# Altium PCB DBMPCB.PcbDoc
Units mm, origin at the board's own origin, x right, y up, seen from the top; angles counter-clockwise.
Board outline 82.68 x 108 mm, 2 copper layers (Top Layer, Bottom Layer); 19 components, 22 nets, 104 pads, 77 vias.
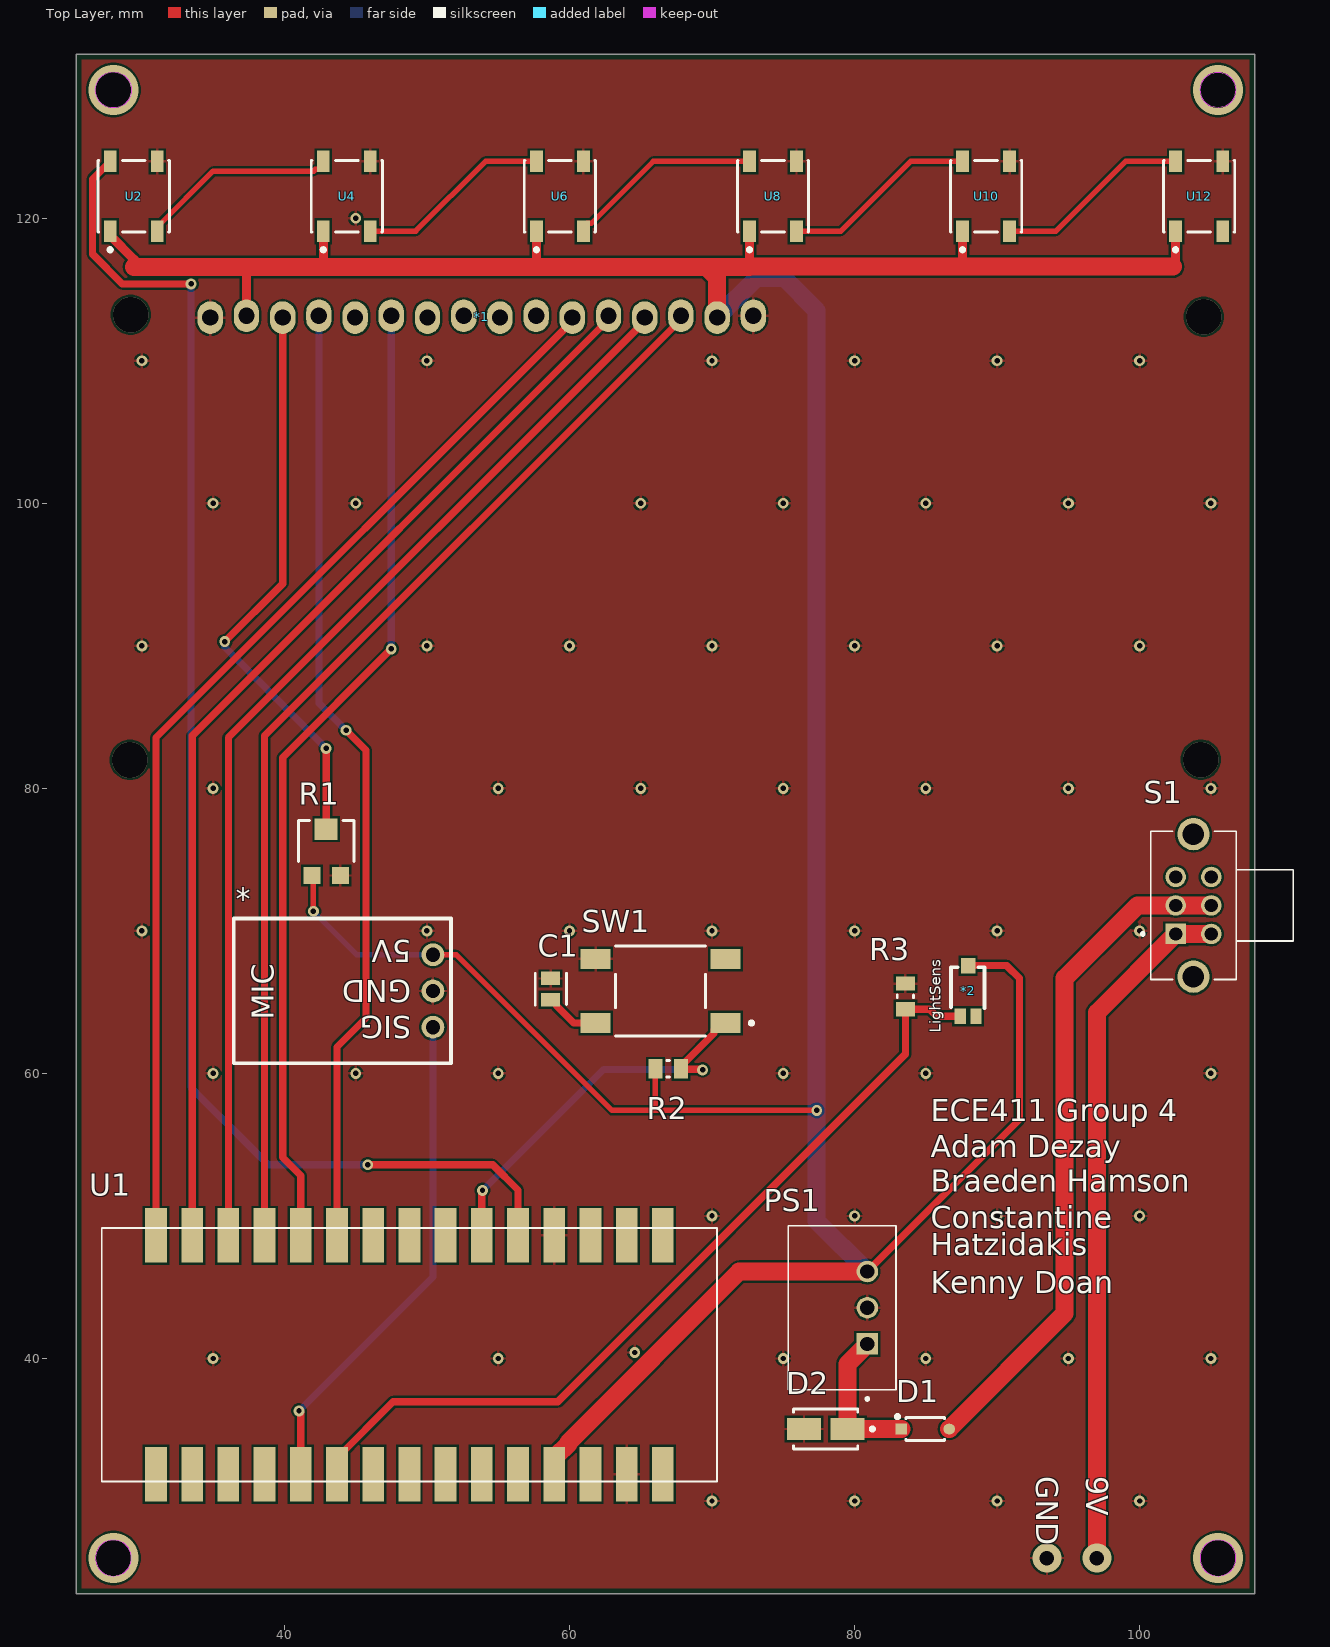
[diagram p0: Top Layer view]
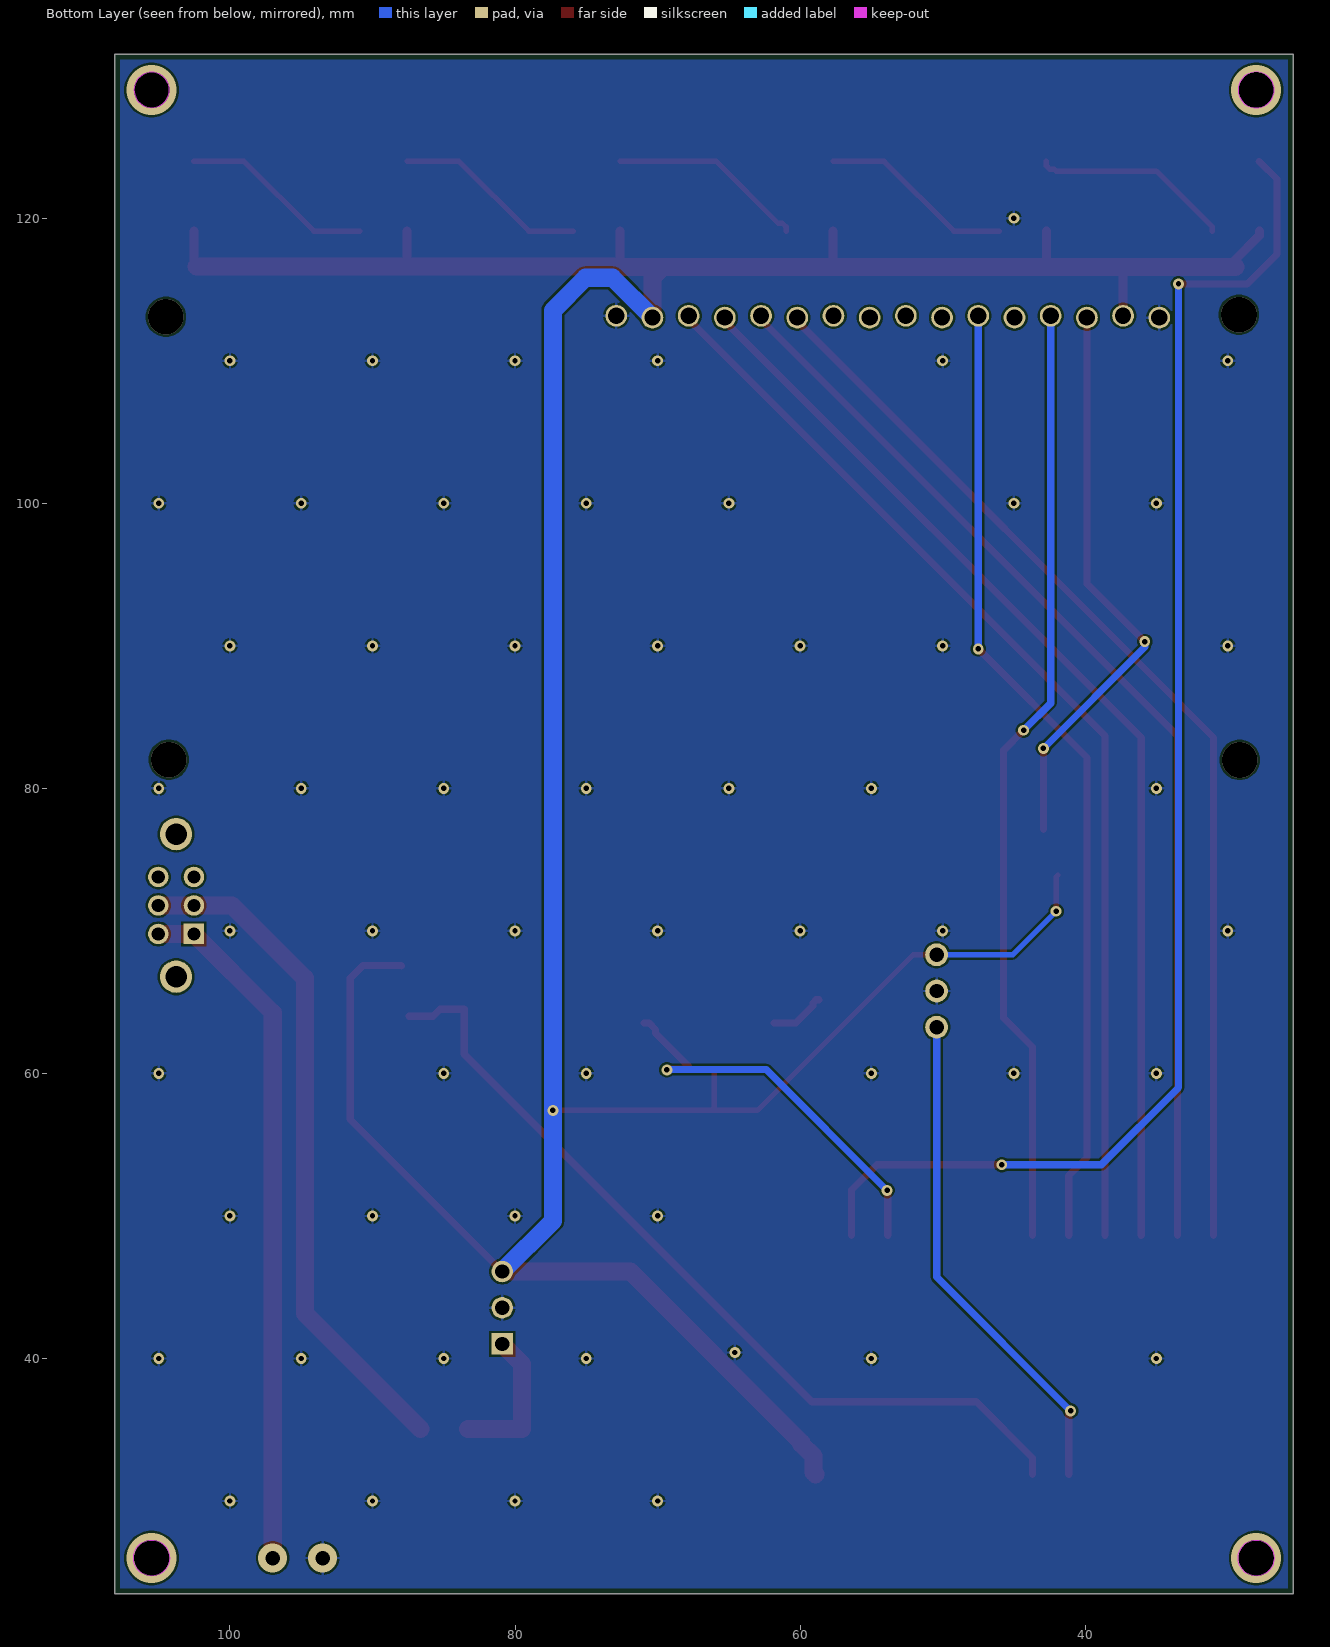
[diagram p1: Bottom Layer view, seen from below]
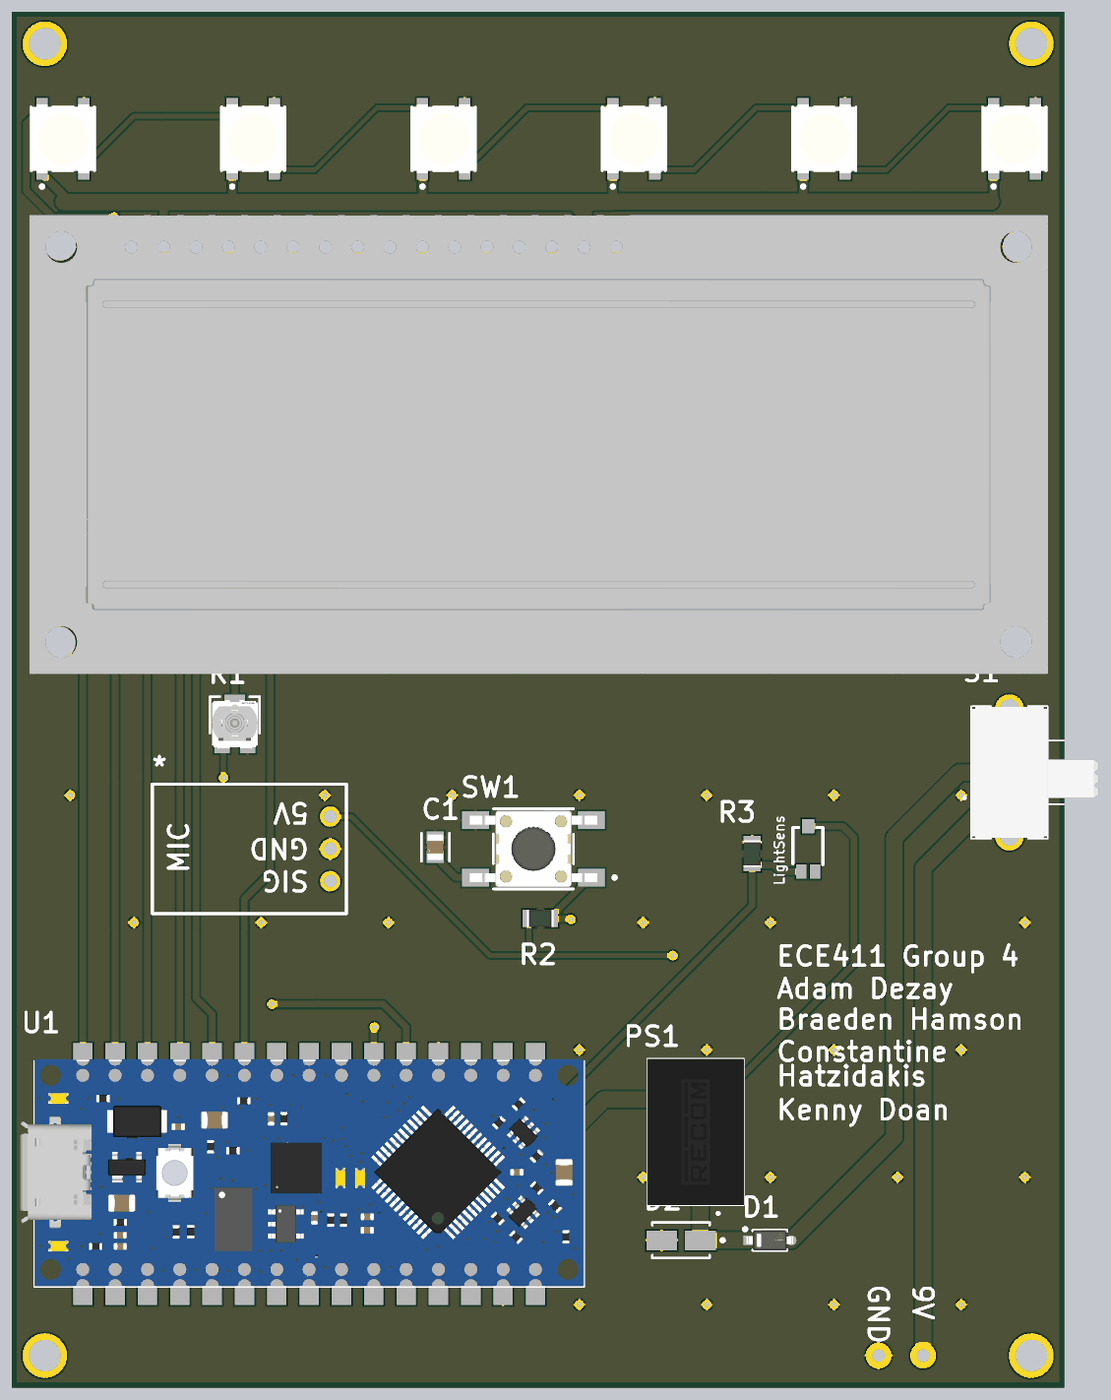
[diagram p2: 3D render of the assembled board from above, using the file's embedded part models]

## Layer stack, top to bottom
Top Solder: solder mask 0.0102, Solder Resist, Dk 3.5
Top Layer: signal copper 0.0356
Dielectric 1: dielectric 0.32, FR-4, Dk 4.8
Bottom Layer: signal copper 0.0356
Bottom Solder: solder mask 0.0102, Solder Resist, Dk 3.5

## Board outline
25.4,23.5 108.077,23.5 108.077,131.5 25.4,131.5
cut-out: 105.5,127.762 cw(c105.5,129) 104.262,129 cw(c105.5,129) 105.5,130.238 cw(c105.5,129) 106.738,129 cw(c105.5,129)
cut-out: 104.239,26 ccw(c105.5,26) 105.5,24.739 ccw(c105.5,26) 106.761,26 ccw(c105.5,26) 105.5,27.261 ccw(c105.5,26)
cut-out: 26.739,26 ccw(c28,26) 28,24.739 ccw(c28,26) 29.261,26 ccw(c28,26) 28,27.261 ccw(c28,26)
cut-out: 28,127.736 cw(c28,129) 26.736,129 cw(c28,129) 28,130.264 cw(c28,129) 29.264,129 cw(c28,129)

## Design rules (kind name [scope] priority, off if disabled: settings)
BoardOutlineClearance [All] p1: gap=0.381 ignorepadtopadclearanceinfootprint=FALSE
Clearance [All] p1: gap=0.152 ignorepadtopadclearanceinfootprint=FALSE except(0: Arc-Hole Track-Hole SMDPad-Hole THPad-Hole Via-Hole Fill-Hole Poly-Hole Region-Hole Text-Hole)
ComponentClearance [All] p1: gap=0.025 collisioncheckmode=3 verticalgap=0.025 showdistances=FALSE
DiffPairsRouting [All] p1: maxlimit=10 minlimit=0.152 mostfreqgap=0.203 toplayer_minwidth=0.152 toplayer_maxwidth=0.381 toplayer_prefwidth=0.203 bottomlayer_minwidth=0.152 bottomlayer_maxwidth=0.381 bottomlayer_prefwidth=0.203 maxuncoupledlength=12.7
HoleSize [All] p1: absolutevalues=TRUE maxlimit=6.731 minlimit=0.33 maxpercent=80.000 minpercent=20.000
HoleToHoleClearance [All] p1: gap=0.254 allowstackedmicrovias=FALSE
MinimumAnnularRing [All] p1: minimumring=0.178
MinimumSolderMaskSliver [All] p1: minsoldermaskwidth=0
PlaneClearance [All] p1: clearance=0.254
PlaneConnect [All] p1: planeconnectstyle=Direct reliefexpansion=0.406 reliefentries=4 reliefconductorwidth=0.152 reliefairgap=0.152
PolygonConnect [All] p1: connectstyle=Relief reliefconductorwidth=0.203 reliefentries=4 polygonreliefangle="90 Angle" airgapwidth=0.152
RoomDefinition DBMSch [InComponentClass('DBMSch')] p1: confinementstyle=ConfineIn formatcopy=TRUE lockcomponents=FALSE outline 0,0 50.8,0 50.8,25.4 0,25.4
RoutingCorners [All] p1: cornerstyle=45-Degree minsetback=1.25 maxsetback=1.25
RoutingVias [All] p1: holewidth=0.381 width=0.762 viastyle="Through Hole" minholewidth=0.33 minwidth=0.686 maxholewidth=2.54 maxwidth=2.896
SilkToSilkClearance [All] p1: silktosilkclearance=0
SilkToSolderMaskClearance [IsPad] p1: minsilkscreentomaskgap=0.152 clearancetoexposedcopper=TRUE
SolderMaskExpansion [All] p1: expansion=0.075 istentingtop=FALSE
Width [All] p1: maxlimit=10.16 minlimit=0.152 preferedwidth=0.508 minimp=50.000000 maximp=50.000000 favimp=50.000000
20 further rules are at their usual default settings.

## Components (designator, comment, footprint, x,y, rotation, side; value= is the part's Value field where it differs from the comment)
* "Sparkfun MEMs Mic" "MEMs Mic Board" 50.419,68.326 r180 top
*1 "Display" Screen 34.798,113.03 r0 top
*2 "TEMT6000 Light Sensor" "Light Sensor" 87.969,67.561 r90 top
C1 "C0805C105Z4VACTU" FP-C0805C105Z4VACTU-MFG 58.674,65.913 r90 top
D1 "MBR0520LT1G" FP-425-04-IPC_C 84.963,35.052 r0 top
D2 "SMAJ12A-E3/61" VISH-DO-214AC-2_N 77.978,35.052 r180 top
PS1 "R-785.0-1.0" CONV_R-785.0-1.0 79.124,43.561 r90 top
R1 "TC33X-2-104E" FP-TC33X-2-MFG 42.926,75.565 r0 top
R2 "RC0805FR-0710KL" RESC2013X60X35NL10T20 66.929,60.325 r180 top
R3 "RC0805FR-0710KL" RESC2013X60X35NL10T20 83.566,65.405 r270 top
S1 "EG2208" SW_EG2208 103.779,71.787 r90 top
SW1 "1571563-9" FP-1571563-9-MFG 66.389,65.786 r180 top
U1 "Arduino Nano Every" MODULE_ABX00028 48.768,40.259 r0 top
U2 "1655" ADA-RGB-1655_V 29.427,121.539 r90 top
U4 "1655" ADA-RGB-1655_V 44.377,121.539 r90 top
U6 "1655" ADA-RGB-1655_V 59.327,121.539 r90 top
U8 "1655" ADA-RGB-1655_V 74.277,121.539 r90 top
U10 "1655" ADA-RGB-1655_V 89.227,121.539 r90 top
U12 "1655" ADA-RGB-1655_V 104.177,121.539 r90 top

## Footprints (in the part's own frame and the unit in brackets; to place one, negate y for a bottom-side part, rotate by r counter-clockwise, add the part's x,y. Pads: shape width x height; smd on the part's side, far side on the other; paste and mask are expansions set on the pad)
ADA-RGB-1655_V [mm] "SMD, 4-Leads, Body 5x5mm"
  rect 1.5x0.9 smd: 1(-2.45,1.65) 2(-2.45,-1.65) 3(2.45,-1.65) 4(2.45,1.65)
  silkscreen extent -3.87,-2.5 2.5,2.5, body extent -2.7,-2.5 2.7,2.5, height 1.68
CONV_R-785.0-1.0 [mm]
  rect 1.508x1.508 hole 1: 1(-2.54,-1.775)
  round 1.508 hole 1: 2(0,-1.775) 3(2.54,-1.775)
  silkscreen extent -6.5,-3.77 5.75,3.77, body extent -5.75,-3.8 5.75,3.8, height 10.31
FP-425-04-IPC_C [mm]
  rect 0.808x0.742 smd paste+0 mask+0: 1(-1.68,0)
  rrect100% 0.808x0.742 smd paste+0 mask+0: 2(1.68,0)
  silkscreen extent -2.07,-0.8 1.35,1, body extent -2.18,-0.9 2.18,0.9, height 0.25
FP-1571563-9-MFG [mm]
  rect 2.1x1.4 smd paste+0 mask+0: 1(-4.55,2.25) 2(4.55,2.25) 3(-4.55,-2.25) 4(4.55,-2.25)
  silkscreen extent -6.5,-3.15 3.15,3.15, body extent -5.7,-3.25 5.7,3.25, height 0.25
FP-C0805C105Z4VACTU-MFG [mm]
  rect 0.95x1.35 smd paste+0 mask+0: 1(-0.75,0) 2(0.75,0)
  silkscreen extent -1.1,-1.11 1.11,1.07, body extent -1.4,-0.85 1.4,0.85, height 0.25
FP-TC33X-2-MFG [mm]
  rect 1.2x1.2 smd paste+0 mask+0: 1(-1,-1.675) 3(1,-1.675)
  rect 1.6x1.5 smd paste+0 mask+0: 2(0,1.575)
  silkscreen extent -1.95,-0.7 1.95,2.17, body extent -2.05,-2.37 2.05,2.42, height 0.25
"Light Sensor" [mm]
  rect 1.1x0.8 smd: 0(-3.55,0.55) ""(-3.55,-0.55)
  rect 1.1x1 smd: 1(0,0)
  silkscreen extent -3,-1.15 -0.1,1.2
"MEMs Mic Board" [mm]
  round 1.6 hole 1: 1(0,0) 2(0,2.54) 3(0,5.08)
  silkscreen extent -1.27,-2.54 13.97,7.62
MODULE_ABX00028 [mil]
  rect 60x150 smd: 1(-700,-330) 2(-600,-330) 3(-500,-330) 4(-400,-330) 5(-300,-330) 6(-200,-330) 7(-100,-330) 8(0,-330) 9(100,-330) 10(200,-330) 11(300,-330) 12(400,-330) 13(500,-330) 14(600,-330) 15(700,-330) 16(700,330) 17(600,330) 18(500,330) 19(400,330) 20(300,330) 21(200,330) 22(100,330) 23(0,330) 24(-100,330) 25(-200,330) 26(-300,330) 27(-400,330) 28(-500,330) 29(-600,330) 30(-700,330)
  silkscreen extent -850,-350 850,350, body extent -894,-345 850,355, height 142
RESC2013X60X35NL10T20 [mm] "Chip Resistor, 2-Leads, Body 2.1x1.35mm, IPC Medium Density"
  rect 1x1.35 smd: 1(-0.9,0) 2(0.9,0)
  silkscreen extent -0.1,-0.58 0.1,0.58, body extent -1.05,-0.68 1.05,0.67, height 0.6
Screen [mil]
  oval 70x90 / inner round 60 / far side round 60 hole 45: 1(0,0) 2(100,5) 3(200,0) 4(300,5) 5(400,0) 6(500,5) 7(600,0) 8(700,5) 9(800,0) 10(900,5) 11(1000,0) 12(1100,5) 13(1200,0) 14(1300,5) 15(1400,0) 16(1500,5)
  body extent -315,-1319 2835,99, height 348
SW_EG2208 [mm]
  rect 1.438x1.438 hole 0.93: 1(-2,1.25)
  round 1.438 hole 0.93: 2(0,1.25) 3(2,1.25) 4(-2,-1.25) 5(0,-1.25) 6(2,-1.25)
  round 2.265 hole 1.51: S1(-5,0) S2(5,0)
  silkscreen extent -5.2,-7 5.2,3.65, body extent -5.15,-7 5.15,3, height 5
VISH-DO-214AC-2_N [mm] "DO-214AC, 2-Leads, Body 4.5x2.79mm, IPC Medium Density"
  rect 2.4x1.55 smd: 1(-1.525,0) 2(1.525,0)
  silkscreen extent -3.4,-1.4 2.25,1.4, body extent -2.25,-1.4 2.25,1.39, height 2.29

## Part data
*2: library part "Light Sensor"
C1: library part CMP-2007-03241-2, "CAP CER 1UF 16V Y5V 0805", Capacitance=1uF, Case Code (Imperial)=0805, Case Code (Metric)=2012, Dielectric=Y5V, Dielectric Material=Ceramic, Max Operating Temperature=85°C, Min Operating Temperature=-30°C, Package Quantity=1, Tolerance=80%, Voltage=16V, Case/Package=0805, Construction=Flat, Contact Material=Tin, Depth=1.25mm, Dissipation Factor=7%, Height=1.25mm, Lead Free="Lead Free", Lead Pitch=0.75mm, Length=2mm, Mount="Surface Mount", Number of Pins=2, Packaging="Tape and Reel", Radiation Hardening=No, REACH SVHC="No SVHC", RoHS Compliant=Yes, Series=C, Termination=SMD/SMT, Thickness=0.055inch, Voltage Rating=16V, Voltage Rating (DC)=16V, Width=0.049inch
D1: library part CMP-1055-00425-2, "DIODE SCHOTTKY 20V 500MA SOD123", Average Rectified Current=500mA, Case/Package=SOD-123-2, Forward Voltage=385mV, Max Forward Surge Current (Ifsm)=5.5A, Max Operating Temperature=125°C, Max Repetitive Reverse Voltage (Vrrm)=20V, Max Reverse Leakage Current=250uA, Min Operating Temperature=-65°C, Package Quantity=3000, Contact Plating=Tin, Current Rating=500mA, Element Configuration=Single, Forward Current=500mA, Height=1.12mm, Lead Free="Lead Free", Length=2.69mm, Max Reverse Voltage (DC)=20V, Max Surge Current=5.5A, Number of Pins=2, Output Current=500mA, Packaging="Tape and Reel", Peak Non-Repetitive Surge Current=5.5A, Peak Reverse Current=250uA, Polarity=Standard, Radiation Hardening=No, REACH SVHC="No SVHC", Termination=SMD/SMT, Voltage Rating (DC)=20V, Width=1.6mm
D2: library part CMP-0544-00020-2, "Transient Voltage Suppressor, 6.40 to 231 V, 12 V Stand-off Voltage, Uni-Directional, -55 to 155 degC, 2-pin DO-214AC, Pb-Free, Tape and Reel", Manufacturer="Vishay Semiconductor", Operating Junction and Storage Temperature Range="-55 to 150 degC", ComponentLink1Description="Manufacturer URL", ComponentLink1URL=http://www.vishay.com/, ComponentLink2Description=Datasheet, ComponentLink2URL=http://www.vishay.com/docs/88390/smaj50a.pdf, ComponentLink3Description="Package Specification", ComponentLink3URL=http://www.vishay.com/docs/88390/smaj50a.pdf, DatasheetVersion=12/8/2013, ID (uA)=1, IFSM="40 A", Mounting Technology="Surface Mount", PackageDescription="2-Pin DO-214AC (SMA), Body 4.245 x 2.665 mm", PackageReference=DO-214AC-2, Packing="Tape and Reel", PartNumber=SMAJ12A-E3/61, PPPM (W)="400, 300", RoHS=TRUE, VBR Uni-Directional (V)="6.4 to 231", VWM (V)=12
PS1: "1.0 Amp SIP3 Single Output", Package=None, Availability=Unavailable, MF="{'manufacturer': u'Recom Power'}", MP=R-785.0-1.0, Price=None
R1: library part CMP-07234-000040-1, "TRIMMER 100K OHM 0.1W J LEAD TOP", Color=Silver, Max Operating Temperature=100°C, Max Power Dissipation=100mW, Min Operating Temperature=-40°C, Package Quantity=2500, Resistance=100kR, Resistance Tolerance=25%, Resistor Type=Carbon, Temperature Coefficient=250ppm/°C, Voltage Rating (DC)=50V, Depth=3.8mm, Height=0.047inch, Length=3mm, Military Standard=Not, Mount="Surface Mount", Number of Turns=1, Packaging="Tape and Reel", Power Rating=100mW, Radiation Hardening=No, REACH SVHC="No SVHC", RoHS Compliant=Yes, Series=TC33, Termination="Foot Print", Tolerance=25%, Weight=29.4mg, Width=0.118inch
R2 R3: library part CMP-1659-00013-4, "Chip Resistor, 10 KOhm, +/- 1%, 0.125 W, -55 to 155 degC, 0805 (2012 Metric), RoHS, Tape and Reel", Manufacturer=Yageo, Max Operating Temperature="155 degC", Min Operating Temperature="-55 degC", Package Quantity=5000, Voltage Rating="150 V", ComponentLink1Description="Manufacturer URL", ComponentLink1URL=http://www.yageo.com/, ComponentLink2Description=Datasheet, ComponentLink2URL=http://www.yageo.com/documents/recent/PYu-RC_Group_51_RoHS_L_04.pdf, DatasheetVersion="Rev. 4, 02/2016", Height="0.5 mm", Length="2 mm", Mount="Surface Mount", Mounting Technology="Surface Mount", PackageDescription="2-Pin Surface Mounted Device, Body 2 x 1.25 mm", PackageReference=0805, Packaging="Tape and Reel", Pins=2, REACH SVHC="No SVHC", RoHSCompliant=true
S1: Package=None, Availability=Unavailable, MF="{'manufacturer': u'E-Switch'}", MP=EG2208, Price=None
SW1: library part CMP-03402-000005-1, "SWITCH TACTILE SPST-NO 0.05A 24V", Contact Current Rating=50mA, Contact Resistance=100mΩ, Manufacturer="TE Connectivity", Operating Force=160gf, Package=SMT_SW_6MM0_6MM0, Temperature="-35°C to +85°C", Temperature Range High=+85°C, Temperature Range Low=-35°C, Voltage Rating Dc=24V, Automotive=No, Category=Switch, ComponentLink2Description=Datasheet, ComponentLink2URL=https://www.te.com/commerce/DocumentDelivery/DDEController?Action=showdoc&DocId=Customer+Drawing%7F2-1437565-7%7FV%7Fpdf%7FEnglish%7FENG_CD_2-1437565-7_V.pdf%7F1571563-9, Device Class L1=Electromechanical, Device Class L2=Switches, Device Class L3="Pushbutton Switches", Digikey Description="SWITCH TACTILE SPST-NO 0.05A 24V", Electromechanical Life=100000Cycles, Height=9.75mm, Lead Free=Yes, Manufacturer Part Number=1571563-9, Mount="Surface Mount", Mouser Description="Tactile Switches SPST OFF(ON) RND SMT MINI PB TACT SWITCH", Octopart=https://octopart.com/1571563-9-te+connectivity-41253969, RoHS=TRUE, Standoff Height=0.05mm, Throw Configuration=SPST-NO
U1: library part ABX00028, "ATmega4809 Arduino Nano Every AVR AVR MCU 8-Bit Embedded Evaluation Board", Package=None, Availability=Unavailable, MF="{'manufacturer': u'Arduino'}", MP=ABX00028, Price=None
U2 U4 U6 U8 U10 U12: library part CMP-2000-05026-1, "Intelligent Control LED Integrated Light Source, 3.5 to 5.3 V, -25 to 80 degC, 4-Pin SMD, RoHS, Tape and Reel", Color=Red,Green,Blue(RGB), Manufacturer=Adafruit-Industries-LLC, Package Description="4-Pin Surface Mount Device, Body 5 x 5 mm", Category=Optoelectronics, Configuration=Discrete, Controller Type=-, Datasheet URL=http://datasheet.octopart.com/ADA1655-Adafruit-Industries-datasheet-32028139.pdf, Datasheet Version=May-13, Family=Addressable,Specialty, Interface=-, Manufacturer URL=https://www.adafruit.com/, Mounting Type=SurfaceMount, Number of LEDs=10, Package Reference=1655, Series=Neopixel, Size / Dimension=5.00mmLx5.00mmW, Utilized LED=WS2812(5050)

## Via types
v1: diameter 0.762, hole 0.381, Top Layer to Bottom Layer, 67 vias
v2: diameter 2.5, hole 2.5, Top Layer to Bottom Layer, 4 vias
v3: diameter 3.5, hole 2.5, Top Layer to Bottom Layer, 4 vias
v4: diameter 2.032, hole 1.016, Top Layer to Bottom Layer, 2 vias

## Nets (pads, with @x,y where several pads share a name; then routed paths per layer and width w, separated by ;. In a path a pad name is that pad's centre, name@x,y a point inside that pad or via, vN(x,y) a via of type N, cw(c..) or ccw(c..) an arc to the next point about the centre after c; other vN are vias at no path point)
+5: *1.2 *1.15 *2.1 *.1 PS1.3 R1.1 R2.2 U1.12 U2.1 U4.1 U6.1 U8.1 U10.1 U12.1 | length 278.7
  Top Layer w0.381: R1.1 42.037,73.779 v1(42.037,71.374) ; *.1 52.07,68.326 62.992,57.404 66.252,57.404 ; R2.2 66.029,57.627 66.252,57.404 ; v1(77.343,57.404) 66.252,57.404
  Top Layer w0.508: PS1.3 91.567,56.769 91.567,66.675 90.678,67.564 87.972,67.564 *2.1
  Top Layer w0.635: U2.1 27.777,118.789 29.464,117.102 29.464,116.586 ; 35.252,116.64 35.306,116.586 ; 37.084,116.586 37.338,116.332 *1.2 ; U4.1 42.727,116.658 42.799,116.586 ; 57.658,116.586 57.677,116.605 U6.1 ; 65.152,116.712 65.278,116.586 ; 72.627,116.603 U8.1 ; 80.102,116.638 80.137,116.603 ; U10.1 87.577,116.656 87.63,116.603 ; 94.996,116.603 95.052,116.659 ; 102.345,116.603 102.527,116.785 U12.1
  Top Layer w1.27: 29.464,116.586 35.306,116.586 37.084,116.586 42.799,116.586 57.658,116.586 65.278,116.586 69.614,116.586 ; U1.12 59.055,32.004 59.055,33.147 59.919,34.011 59.919,34.108 71.911,46.101 PS1.3 ; *1.15 70.358,115.842 69.614,116.586 ; 72.627,116.586 69.614,116.586 ; 72.627,116.603 80.137,116.603 87.63,116.603 94.996,116.603 102.345,116.603
  Bottom Layer w0.381: v1(42.037,71.374) 45.085,68.326 *.1
  Bottom Layer w1.27: *1.15 73.152,115.824 75.057,115.824 77.343,113.538 v1(77.343,57.404) 77.343,49.657 PS1.3
AudioLevelOut: *.3 U1.5 | length 35.3
  Top Layer w0.508: v1(41.021,36.322) 41.148,36.195 U1.5
  Bottom Layer w0.508: v1(41.021,36.322) 50.419,45.72 *.3
D4: *1.11 U1.30 | length 76.5
  Top Layer w0.508: U1.30 30.988,83.566 60.198,112.776 *1.11
D5: *1.12 U1.29 | length 76.6
  Top Layer w0.508: U1.29 33.528,83.693 62.738,112.903 *1.12
D6: *1.13 U1.28 | length 76.5
  Top Layer w0.508: U1.28 36.068,83.566 65.278,112.776 *1.13
D7: *1.14 U1.27 | length 76.6
  Top Layer w0.508: U1.27 38.608,83.693 67.818,112.903 *1.14
EN: *1.6 U1.26 | length 68.2
  Top Layer w0.508: U1.26 41.148,52.832 39.878,54.102 39.878,82.169 v1(47.498,89.789)
  Bottom Layer w0.508: v1(47.498,89.789) *1.6
GND: *1.1 *1.16 *.2 C1.2 D2.2 PS1.2 R1.3 R3.1 SW1.4 U1.14 U1.19 U2.3 U4.3 U6.3 U8.3 U10.3 U12.3
  other v1: 70,30 80,30 90,30 100,30 35,40 55,40 75,40 85,40 95,40 105,40 64.579,40.421 70,50 80,50 90,50 100,50 35,60 45,60 55,60 75,60 85,60 105,60 30,70 50,70 60,70 70,70 80,70 90,70 100,70 35,80 55,80 65,80 75,80 85,80 95,80 105,80 30,90 50,90 60,90 70,90 80,90 90,90 100,90 35,100 45,100 65,100 75,100 85,100 95,100 105,100 30,110 50,110 70,110 80,110 90,110 100,110 45,120
  other v4: 93.5,26
LightLevelOut: *2.0 R3.2 U1.6 | length 60
  Top Layer w0.508: U1.6 43.688,33.02 47.625,36.957 59.182,36.957 83.566,61.341 R3.2 85.26,64.505 85.754,64.011 *2.0
NeoPixelData: U1.20 U2.4 | length 100.3
  Top Layer w0.508: U2.4 26.543,122.755 26.543,117.475 28.626,115.392 v1(33.452,115.392) ; v1(45.847,53.594) 54.61,53.594 56.388,51.816 U1.20
  Bottom Layer w0.508: v1(33.452,115.392) 33.452,59.004 38.862,53.594 v1(45.847,53.594)
Net*1_3: *1.3 R1.2 | length 40.5
  Top Layer w0.508: v1(35.814,90.297) 39.878,94.361 *1.3 ; R1.2 v1(42.926,82.804)
  Bottom Layer w0.508: v1(35.814,90.297) 35.814,89.916 v1(42.926,82.804)
NetC1_1: C1.1 SW1.2 | length 4
  Top Layer w0.508: C1.1 58.874,65.163 59.095,64.942 59.095,64.742 60.301,63.536 SW1.2
NetD1_1: D1.1 D2.1 PS1.1 | length 10.3
  Top Layer w1.27: PS1.1 79.503,39.625 D2.1 D1.1
NetD1_2: D1.2 S1.2 S1.5 | length 47.4
  Top Layer w1.27: D1.2 94.742,43.151 94.742,66.675 99.854,71.787 S1.2 S1.5
NetS1_1: S1.1 S1.4 | length 48.6
  Top Layer w1.27: v4(97,26) 97,64.258 S1.1 S1.4
NetU2_2: U2.2 U4.4 | length 14
  Top Layer w0.381: U2.2 31.077,119.389 34.992,123.304 42.042,123.304 42.167,123.429 42.467,123.429 42.727,123.689 U4.4
NetU4_2: U4.2 U6.4 | length 13.7
  Top Layer w0.381: U4.2 49.205,119.089 54.105,123.989 U6.4
NetU6_2: U6.2 U8.4 | length 13.9
  Top Layer w0.381: U6.2 60.977,119.389 61.236,119.649 61.536,119.649 65.877,123.989 U8.4
NetU8_2: U8.2 U10.4 | length 13.7
  Top Layer w0.381: U8.2 79.035,119.089 83.935,123.989 U10.4
NetU10_2: U10.2 U12.4 | length 13.7
  Top Layer w0.381: U10.2 94.118,119.089 99.018,123.989 U12.4
Reset: R2.1 SW1.1 U1.21 | length 28.4
  Top Layer w0.508: U1.21 53.848,51.74 v1(53.899,51.791) ; v1(69.342,60.249) 69.304,60.287 67.867,60.287 R2.1 67.829,60.5 70.143,62.814 70.143,63.09 70.59,63.536 SW1.1
  Bottom Layer w0.508: v1(53.899,51.791) 62.382,60.274 69.088,60.274 69.113,60.249 v1(69.342,60.249)
RS: *1.4 U1.25 | length 66.7
  Top Layer w0.508: U1.25 43.688,61.853 45.72,63.885 45.72,82.677 v1(44.323,84.074)
  Bottom Layer w0.508: *1.4 42.418,85.979 v1(44.323,84.074)
pads on no net: *1.5 *1.7 *1.8 *1.9 *1.10 *2. S1.3 S1.6 S1.S1 S1.S2 SW1.3 U1.1 U1.2 U1.3 U1.4 U1.7 U1.8 U1.9 U1.10 U1.11 U1.13 U1.15 U1.16 U1.17 U1.18 U1.22 U1.23 U1.24 U12.2
copper on no net:
  other v2: 29.159,81.991 104.292,82.017 104.496,113.081 29.21,113.233
  other v3: 28,26 105.5,26 28,129 105.5,129

## Polygon pours and split planes (outlines as drawn)
GND on Bottom Layer "GND_L02_P001" (solid, pour order 1): 25.146,131.623 25.375,131.394 107.925,131.394 107.925,23.749 108.153,23.52 25.4,23.52
GND on Top Layer "GND_L01_P000" (solid, pour order 0): 25.476,131.521 108.128,131.521 108.128,23.571 108.077,23.52 25.425,23.52

## Silkscreen, mask and mechanical layers (free items; w line width, h text height)
Top Overlay:
  text "ECE411 Group 4" at 85.344,56.642 h1.52
  text "Adam Dezay" at 85.344,54.102 h1.52
  text "Braeden Hamson" at 85.344,51.689 h1.52
  text "Constantine" at 85.344,49.149 h1.52
  text "Hatzidakis" at 85.344,47.244 h1.52
  text "Kenny Doan" at 85.344,44.577 h1.52
  text "GND" at 92.754,31.746 h1.52 r270
  text "9V" at 96.254,31.746 h1.52 r270
Mechanical 1:
  circle w0.254: c28,129 r1.264
  circle w0.254: c105.5,129 r1.238
  circle w0.254: c105.5,26 r1.261
  circle w0.254: c28,26 r1.261
BoardOutline:
  the board outline again, w0.5

## Text inside footprints (layer, text, board x,y; h text height)
*: Top Overlay "MIC" at 39.243,63.754 h1.52 r90; Top Overlay "SIG" at 48.895,64.008 h1.52 r180; Top Overlay "GND" at 48.895,66.548 h1.52 r180; Top Overlay "5V" at 48.895,69.342 h1.52 r180
*2: Top Overlay "LightSens" at 86.064,62.862 h0.76 r90